# Altium PCB BeamBreakFix.PcbDoc
Units mm, origin at the board's own origin, x right, y up, seen from the top; angles counter-clockwise.
Board outline 22.2 x 51.3 mm, 2 copper layers (Top Layer, Bottom Layer), stack 0.97 mm thick; 15 components, 14 nets, 79 pads, 71 vias.
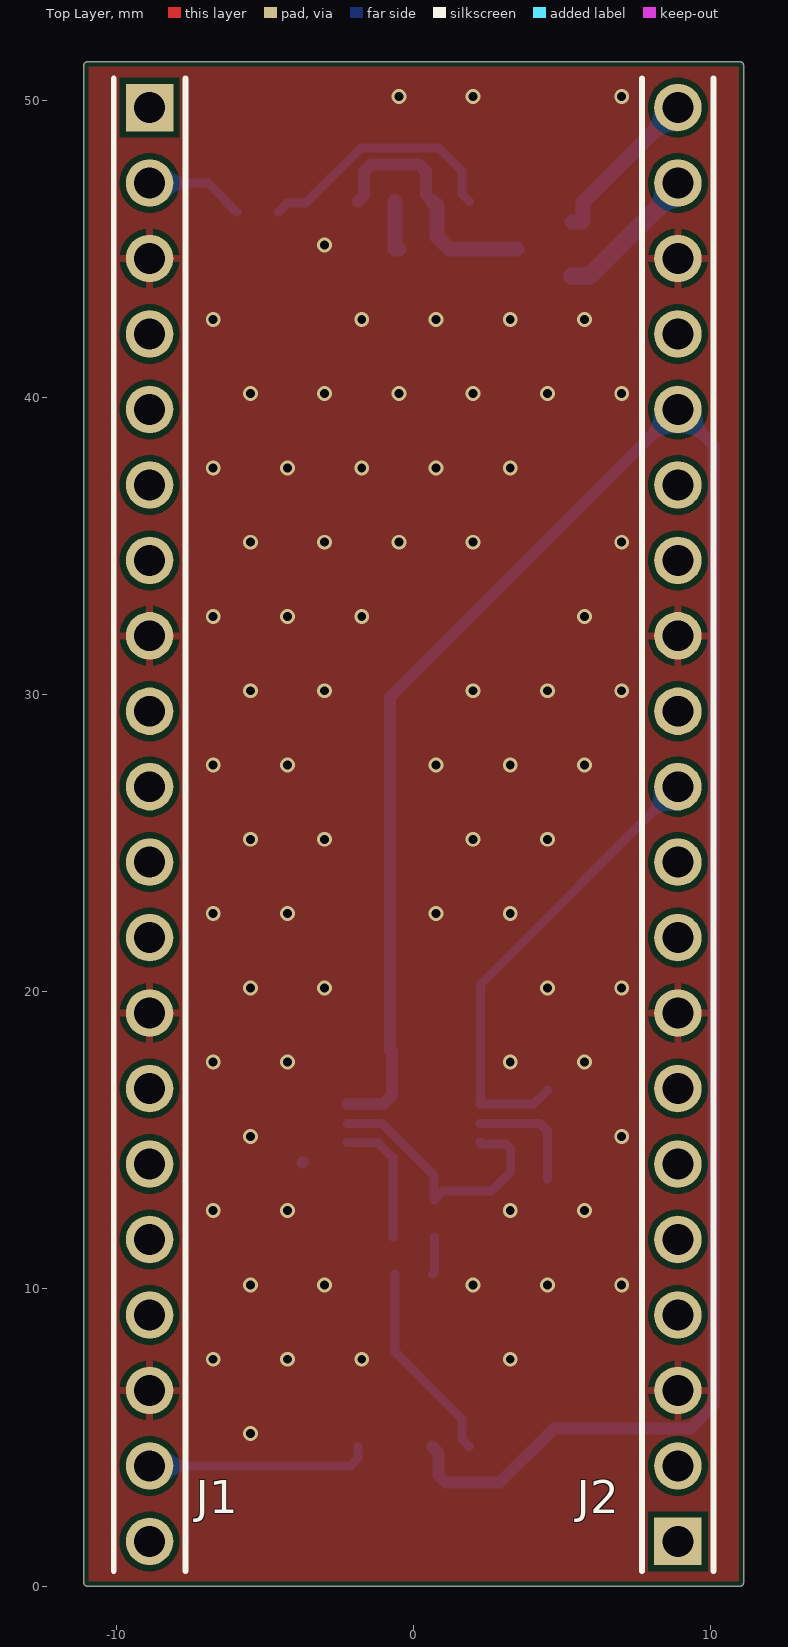
[diagram p0: Top Layer view]
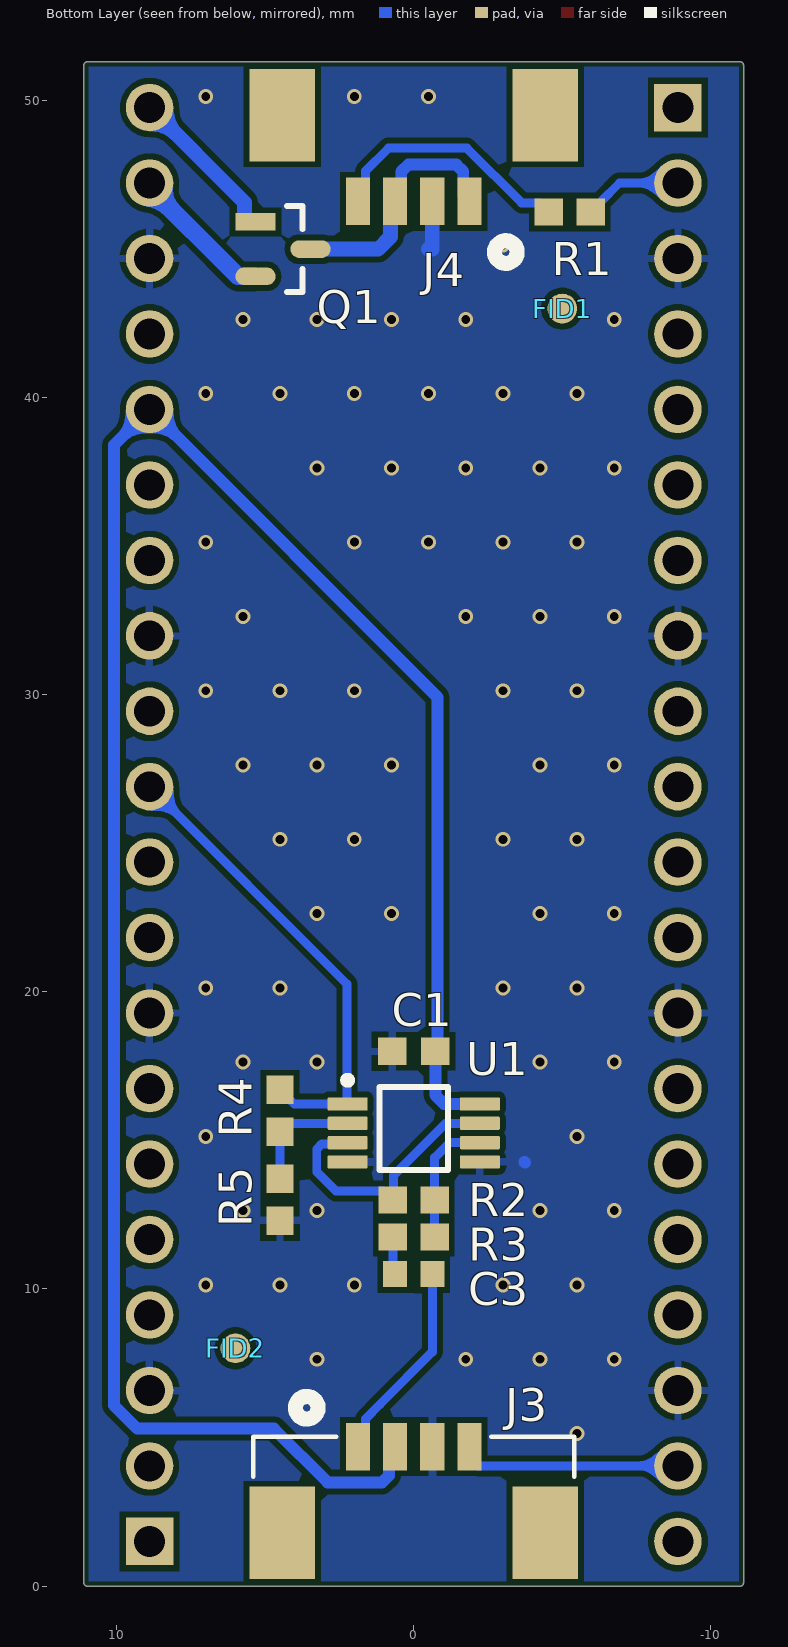
[diagram p1: Bottom Layer view, seen from below]
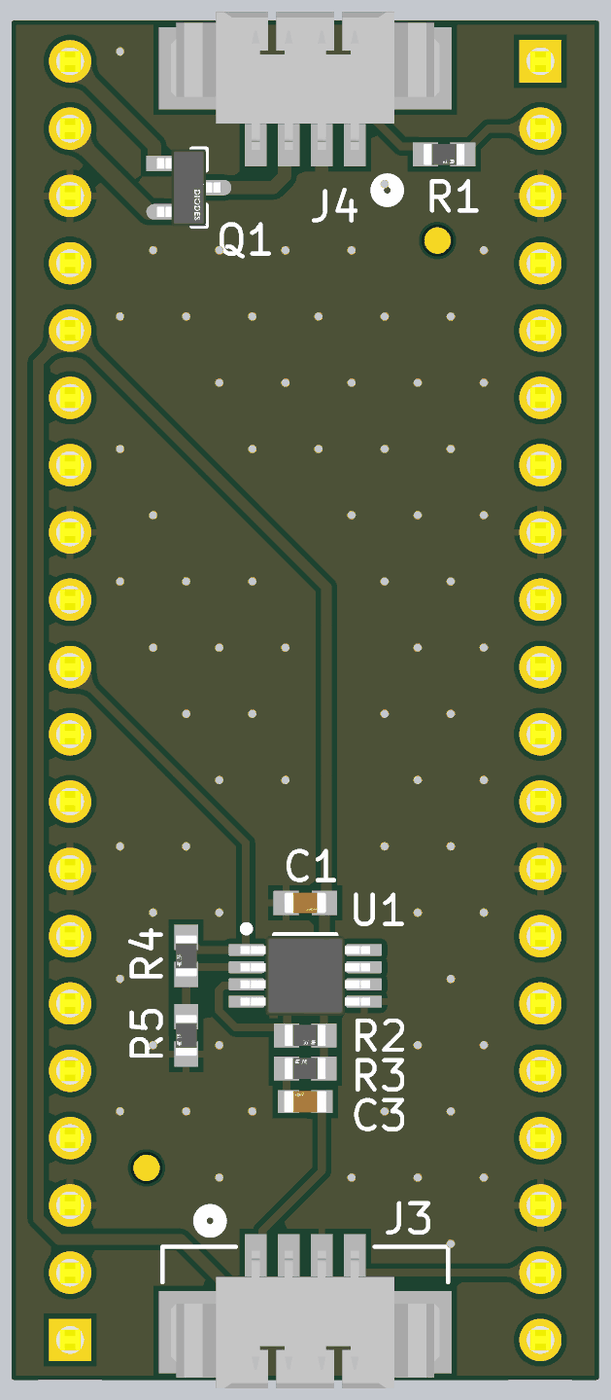
[diagram p2: 3D render of the assembled board from below, using the file's embedded part models]

## Layer stack, top to bottom
Top Solder: solder mask 0.0127, Solder Resist, Dk 3.8
Top Layer: signal copper 0.035
Dielectric: core 0.9, FR-4, Dk 4.5
Bottom Layer: signal copper 0.035
Bottom Solder: solder mask 0.0127, Solder Resist, Dk 3.8

## Board outline
-11.1,0.1 -11.1,51.2 cw(c-11,51.2) -11,51.3 11,51.3 cw(c11,51.2) 11.1,51.2 11.1,7.003 11.1,0.1 cw(c11,0.1) 11,0 -11,0 cw(c-11,0.1)

## Design rules (kind name [scope] priority, off if disabled: settings)
BoardOutlineClearance [All] p1: gap=0.15 ignorepadtopadclearanceinfootprint=FALSE except(0.05: Arc-OutlineEdge Arc-CavityEdge Arc-CutoutEdge Arc-SplitBarrior Arc-SplitContinuation)
Clearance Clearance_2 [HasFootprint('GCT_USB4080-03-A_REVA1')] p1: gap=0.2 ignorepadtopadclearanceinfootprint=TRUE except(0.1: Arc-Hole Track-Hole SMDPad-Hole THPad-Hole Via-Hole Fill-Hole Poly-Hole Region-Hole Text-Hole)
Clearance Clearance_1 [HasFootprint('GCT_USB4080-03-A_REVA1') vs OnLayer('Multi-Layer')] p2: gap=0 ignorepadtopadclearanceinfootprint=FALSE
Clearance [All] p3: gap=0.203 ignorepadtopadclearanceinfootprint=TRUE
ComponentClearance [All] p1: gap=0.254 collisioncheckmode=3 verticalgap=0.254 showdistances=FALSE donotcheckwithout3dbody=TRUE
HoleSize "HoleSize Via - Top-Int1" [InDrillLayerPair('[UVIA] Top Layer - Int1')] p1: absolutevalues=TRUE maxlimit=0.2 minlimit=0.15 maxpercent=80.000 minpercent=20.000
HoleSize "HoleSize Via - Bot-Int2" [InDrillLayerPair('[UVIA] Int2 - Bottom Layer')] p2: absolutevalues=TRUE maxlimit=0.2 minlimit=0.15 maxpercent=80.000 minpercent=20.000
HoleSize [All] p3: absolutevalues=TRUE maxlimit=3 minlimit=0.25 maxpercent=80.000 minpercent=20.000
HoleToHoleClearance HoleToHoleClearance_1 [HasFootprint('GCT_USB4080-03-A_REVA1')] p1: gap=0 allowstackedmicrovias=TRUE
HoleToHoleClearance [All] p2: gap=0.1 allowstackedmicrovias=TRUE
MinimumAnnularRing MinimumAnnularRing_VIA [IsVia] p1: minimumring=0.075
MinimumAnnularRing MinimumAnnularRing_VIA_U10 [OnLayer('Multi-Layer')] p2: minimumring=0.112
MinimumAnnularRing [All] p3: minimumring=0.178
MinimumSolderMaskSliver [All] p1: minsoldermaskwidth=0.076
PasteMaskExpansion PasteMaskExpansion_FDMC8030 [HasFootprint('TRANS_FDMC8030')] p1: expansion=0 percent=-20.000000
PasteMaskExpansion PasteMaskExpansion_IC_TPSM5601RSHRDAR [HasFootprint('IC_TPSM5601R5HRDAR')] p2: expansion=0 percent=-20.000000
PasteMaskExpansion PasteMaskExpansion_SOP65P490X110-8N [HasFootprint('SOP65P490X110-8N')] p3: expansion=0 percent=-20.000000
PasteMaskExpansion [All] p4: expansion=0
PlaneConnect [All] p1: planeconnectstyle=Relief reliefexpansion=0.508 reliefentries=4 reliefconductorwidth=0.254 reliefairgap=0.203
PolygonConnect PolygonConnect_SOLID [InNetClass('Power Nets')] p1: connectstyle=Direct reliefconductorwidth=0.254 reliefentries=4 polygonreliefangle="90 Angle" airgapwidth=0.254
PolygonConnect PolygonConnect_1 [All] p2: thpad.connectstyle=Relief thpad.reliefconductorwidth=0.254 thpad.reliefentries=4 thpad.polygonreliefangle="90 Angle" thpad.airgapwidth=0.203 smdpad.connectstyle=Relief smdpad.reliefconductorwidth=0.254 smdpad.reliefentries=4 smdpad.polygonreliefangle="90 Angle" smdpad.airgapwidth=0.203 via.connectstyle=Direct via.reliefconductorwidth=0.254 via.reliefentries=4 via.polygonreliefangle="90 Angle" via.airgapwidth=0.254
RoutingVias Vias_Top-Bottom [InDrillLayerPair('Top Layer - Bottom Layer')] p1: holewidth=0.25 width=0.55 viastyle="Through Hole" minholewidth=0.25 minwidth=0.5 maxholewidth=0.4 maxwidth=0.8
RoutingVias Vias_Blind_Top-Int1 [InDrillLayerPair('[UVIA] Top Layer - Int1')] p2: holewidth=0.15 width=0.3 viastyle="Through Hole" minholewidth=0.15 minwidth=0.3 maxholewidth=0.25 maxwidth=0.474
RoutingVias Vias_Blind_Bot-Int2 [InDrillLayerPair('[UVIA] Int2 - Bottom Layer')] p3: holewidth=0.15 width=0.3 viastyle="Through Hole" minholewidth=0.15 minwidth=0.3 maxholewidth=0.25 maxwidth=0.474
RoutingVias Vias_Burried [InDrillLayerPair('Int1 - Int2')] p4: holewidth=0.25 width=0.504 viastyle="Through Hole" minholewidth=0.25 minwidth=0.504 maxholewidth=0.35 maxwidth=0.604
ShortCircuit ShortCircuit_1 [HasFootprint('GCT_USB4080-03-A_REVA1') vs InNet('GND')] p1: allowed=TRUE
ShortCircuit [All] p2: allowed=FALSE
SilkToSilkClearance [All] p1: silktosilkclearance=0.1
SilkToSolderMaskClearance [IsPad] p1: minsilkscreentomaskgap=0.15 clearancetoexposedcopper=TRUE
SolderMaskExpansion SolderMaskExpansion_Vias [IsVia] p1: expansion=0 istentingtop=TRUE
SolderMaskExpansion [All] p2: expansion=0 istentingtop=FALSE
ViasUnderSMD [All] p1: allowed=TRUE
Width [All] p1: maxlimit=2 minlimit=0.2 preferedwidth=0.25 minimp=50.000000 maximp=50.000000 favimp=50.000000
21 further rules are at their usual default settings.

## Classes and differential pairs
component class PicoModuleInterface: FID1 FID2 J1 J2
component class BeamBreakFix: C1 C3 J3 J4 Q1 R1 R2 R3 R4 R5 U1

## Components (designator, comment, footprint, x,y, rotation, side; value= is the part's Value field where it differs from the comment)
C1 "C0603-100nF-100V-10%-X7R" FP-GRM188-0_1-e0_2_0_5-IPC_B 0,18 r180 bottom value=100nF
C3 "C0603-1nF-50V-1%-C0G" FP-0603-L_1_6_0_15-W_0_81-IPC_C 0,10.5 r0 bottom value=1nF
FID1 "FID-ROUND" Fid_Round -5,43 r90 bottom
FID2 "FID-ROUND" Fid_Round 6,8 r90 bottom
J1 "SSW-120-01-x-S" SAMTEC_SSW-120-01-G-S -8.89,49.765 r270 top locked
J2 "SSW-120-01-x-S - 21-40" "SAMTEC_SSW-120-01-G-S - 21-40" 8.89,1.505 r90 top locked
J3 "53261-0471" MOLEX_53261-0471 0,2.1 r180 bottom
J4 "53261-0471" MOLEX_53261-0471 0,49.2 r0 bottom
Q1 "DMG2305UX-7" FP-SOT23-IPC_B 4.4,45 r180 bottom
R1 "R0603-150R-1/16W-0.1%" FP-CPF0603-IPC_B -5.25,46.25 r0 bottom value=150
R2 "R0603-1M-1/16W-0.1%" FP-CPF0603-IPC_B 0,13 r0 bottom value=1M
R3 "R0603-1M-1/16W-0.1%" FP-CPF0603-IPC_B 0,11.75 r180 bottom value=1M
R4 "R0603-100k-1/16W-0.1%" FP-CPF0603-IPC_B 4.5,16 r90 bottom value=100k
R5 "R0603-4k7-1/16W-0.1%" FP-CPF0603-IPC_B 4.5,13 r90 bottom value=4.7k
U1 "OPA2353EA/250" DGK0008A_N 0,15.25 r180 bottom

## Footprints (in the part's own frame and the unit in brackets; to place one, negate y for a bottom-side part, rotate by r counter-clockwise, add the part's x,y. Pads: shape width x height; smd on the part's side, far side on the other; paste and mask are expansions set on the pad)
DGK0008A_N [mm] "TSOP, 8-Leads, Body 3.1x3.1mm, Pitch 0.65mm, IPC Medium Density"
  rrect22% 1.35x0.45 smd: 1(-2.225,0.975) 2(-2.225,0.325) 3(-2.225,-0.325) 4(-2.225,-0.975) 5(2.225,-0.975) 6(2.225,-0.325) 7(2.225,0.325) 8(2.225,0.975)
  silkscreen extent -2.35,-1.25 1.15,1.9, body extent -2.45,-1.5 2.45,1.5, height 0.94
Fid_Round [mm] "Round Fiducial"
  round 1 smd paste-1 mask+0.1: FID(0,0)
FP-0603-L_1_6_0_15-W_0_81-IPC_C [mm]
  rect 0.807x0.868 smd paste+0 mask+0: 1(-0.626,0) 2(0.626,0)
  body extent -0.8,-0.41 0.8,0.41, height 0.9
FP-CPF0603-IPC_B [mm]
  rect 0.958x0.912 smd paste+0 mask+0: 1(-0.702,0) 2(0.702,0)
  body extent -0.77,-0.4 0.77,0.4, height 0.55
FP-GRM188-0_1-e0_2_0_5-IPC_B [mm]
  rect 0.959x0.912 smd paste+0 mask+0: 1(-0.727,0) 2(0.727,0)
  body extent -0.8,-0.4 0.8,0.4, height 0.9
FP-SOT23-IPC_B [mm]
  rect 1.359x0.587 smd paste+0 mask+0: 1(-0.927,0.915)
  rrect100% 1.359x0.587 smd paste+0 mask+0: 2(-0.927,-0.915) 3(0.927,0)
  silkscreen extent 0.13,-1.45 0.65,1.45, body extent -1.2,-1.45 1.2,1.45, height 1.1
MOLEX_53261-0471 [mil] "UL"
  rect 32x63 smd paste+0 mask+0: 1(-73.82,102.13) 2(-24.61,102.13) 3(24.61,102.13) 4(73.82,102.13)
  rect 87x122 smd: 5(-174.21,-12.05) 6(174.21,-12.05)
  silkscreen extent -212,62 212,169, body extent -200,-95 200,109, height 134
SAMTEC_SSW-120-01-G-S [mm] "Socket Strip, 0.100\" Pitch"
  rect 1.6x1.6 hole 1.04: 1(0,0)
  round 1.6 hole 1.04: 2(2.54,0) 3(5.08,0) 4(7.62,0) 5(10.16,0) 6(12.7,0) 7(15.24,0) 8(17.78,0) 9(20.32,0) 10(22.86,0) 11(25.4,0) 12(27.94,0) 13(30.48,0) 14(33.02,0) 15(35.56,0) 16(38.1,0) 17(40.64,0) 18(43.18,0) 19(45.72,0) 20(48.26,0)
  silkscreen extent -0.98,-1.21 49.27,1.21, body extent -1.52,-1.21 49.78,1.21, height 8.51
"SAMTEC_SSW-120-01-G-S - 21-40" [mm] "Socket Strip, 0.100\" Pitch (pins 21 - 40)"
  rect 1.6x1.6 hole 1.04: 21(0,0)
  round 1.6 hole 1.04: 22(2.54,0) 23(5.08,0) 24(7.62,0) 25(10.16,0) 26(12.7,0) 27(15.24,0) 28(17.78,0) 29(20.32,0) 30(22.86,0) 31(25.4,0) 32(27.94,0) 33(30.48,0) 34(33.02,0) 35(35.56,0) 36(38.1,0) 37(40.64,0) 38(43.18,0) 39(45.72,0) 40(48.26,0)
  silkscreen extent -1.01,-1.21 49.24,1.21, body extent -1.52,-1.21 49.78,1.21, height 8.51

## Part data
C1: library part CMP-611-0027-19, "0.1µF ±10% 100V Ceramic Capacitor X7R 0603 (1608 Metric)", Capacitance=100nF, Capacitor Type=Ceramic, Case Code (Imperial)=0603, Case Code (Metric)=1608, Dielectric=X7R, Max Operating Temperature=125°C, Min Operating Temperature=-55°C, Package Quantity=1, Tolerance=10%, Voltage=100V, Case/Package=0603, Construction=Flat, Depth=0.8mm, Height=0.8mm, Lead Free="Lead Free", Length=1.6mm, Material=Ceramic, Mount="Surface Mount", Packaging="Tape and Reel", Pick&PlaceFootprint=0603_CAP, Radiation Hardening=No, REACH SVHC="No SVHC", RoHS=Yes, RoHS Compliant=Yes, Series=GRM, Size=0.8mm, Termination=SMD/SMT, Thickness=0.035inch, Voltage Rating=100V, Voltage Rating (DC)=100V, Weight=0.000222oz, Width=0.8mm
C3: library part CMP-611-0035-5, "0.001µF ±1% 50V Ceramic Capacitor C0G 0603 (1608 Metric)", Capacitor Type=Ceramic, Case/Package=0603_CAP, Dielectric=C0G, PartNumber=C0603-1nF-50V-5%-COG, Tolerance=1%, Voltage Rating=50V, Mount="Surface Mount", Pick&PlaceFootprint=C0603, RoHS=Yes
FID1 FID2: library part CMP-C00-0001-2, "Round Fiducial"
J1: library part CMP-310-0034-3, "Conn Socket Strip SKT 20 POS 2.54mm Solder ST Thru-Hole", Color=Black, Contact Material=Bronze, Contact Plating=Gold, Gender=Female, Mating Cycles=100, Mount="Through Hole", Number of Contacts=20, Number of Rows=1, Pitch=2.54mm, RoHS Compliant=Yes, Termination=Solder
J2: library part CMP-310-0035-2, "Conn Socket Strip SKT 20 POS 2.54mm Solder ST Thru-Hole (pins 21 - 40)", Color=Black, Contact Material=Bronze, Contact Plating=Gold, Gender=Female, Mating Cycles=100, Mount="Through Hole", Number of Contacts=20, Number of Rows=1, Pitch=2.54mm, RoHS Compliant=Yes, Termination=Solder
J3 J4: library part CMP-370-0017-6, "MOLEX 1.25mm (.049\") Pitch PicoBlade Header, Surface Mount, Right Angle, Lead-free, 4 Circuits", Color=Beige, Contact Resistance=20mR, Current Rating=1A, Flammability Rating="UL94 V-0", Housing Color=Natural, Insulation Resistance=100MR, Max Operating Temperature=105°C, Min Operating Temperature=-40°C, Package Quantity=1000, Voltage Rating=125V, Case/Package=53261-0471, Contact Gender=Male, Contact Material=Tin, Contact Plating=Tin, Contact Type=-, Gender=Male, Glow Wire Compliant=Non-compliant, Housing Material=Thermoplastic, Lead Free="Lead Free", Lead Pitch=1.25mm, Mount="Surface Mount", Number of Circuits=4, Number of Contacts=4, Number of Positions=4, Number of Rows=1, Orientation="Right Angle", Packaging="Cut Tape", Pitch=1.25mm, Radiation Hardening=No, REACH SVHC=Unknown, Series=53261, Termination=SMD/SMT, Voltage Rating (AC)=125V, Voltage Rating (DC)=125V, Weight=0.005598oz, Working Voltage=125V
Q1: library part CMP-830-0007-1, "Power Field-Effect Transistor, 4.2A I(D), 20V, 0.052ohm, 1-Element, P-Channel, Silicon, Metal-oxide Semiconductor FET", PartNumber=DMG2305UX, Mount="Surface Mount", Pick&PlaceFootprint=SOT-23-3
R1: library part CMP-633-0078-2, "Surface Mount Resistor 150 Ohm 1/16 W 0.1% 0603 (1608 Metric)", Case Code (Imperial)=0603, Case Code (Metric)=1608, Max Operating Temperature=155°C, Max Power Dissipation="62.5 mW", Min Operating Temperature=-55°C, Number of Resistors=1, Power Rating=62.5mW, Resistance=150, Resistance Tolerance=0.1%, Resistor Type="FIXED RESISTOR", Temperature Coefficient=25ppm/°C, Voltage Rating=50V, Case/Package=0603, Composition="Thin Film", Construction=Chip, ELV=Compliant, Height=0.45mm, Length=1.6mm, Mount="Surface Mount", Number of Pins=2, Number of Terminations=2, Packaging="Tape and Reel", Pick&PlaceFootprint=R0603, REACH SVHC=Yes, RoHS=Yes, RoHS Compliant=Yes, Series=CPF, Size Code=0603, Technology="THIN FILM", Termination=Wraparound, Tolerance=0.1%, Voltage Rating (DC)=50V, Weight=7.1E-05oz, Width=0.8mm
R2 R3: library part CMP-633-0066-9, "Surface Mount Resistor 1M Ohm 1/16 W 0.1% 0603 (1608 Metric)", Case Code (Imperial)=0603, Case Code (Metric)=1608, Max Operating Temperature=155°C, Max Power Dissipation="62.5 mW", Min Operating Temperature=-55°C, Number of Resistors=1, Power Rating=62.5mW, Resistance=1M, Resistance Tolerance=0.1%, Resistor Type="Thin Film", Temperature Coefficient=25ppm/°C, Voltage Rating=50V, Case/Package=0603, Composition="Thin Film", ELV=Compliant, Height=0.45mm, Length=1.6mm, Mount="Surface Mount", Number of Pins=2, Number of Terminations=2, Packaging="Tape and Reel", Pick&PlaceFootprint=R0603, REACH SVHC="No SVHC", RoHS=Yes, RoHS Compliant=Yes, Series=CPF, Size Code=0603, Technology="Thin Film", Termination=Solder, Tolerance=0.1%, Voltage Rating (DC)=50V, Weight=7.1E-05oz, Width=0.8mm
R4: library part CMP-633-0000-17, "Surface Mount Resistor 100k Ohm 1/16 W 0.1% 0603 (1608 Metric)", Case Code (Imperial)=0603, Case Code (Metric)=1608, Max Operating Temperature=155°C, Max Power Dissipation="62.5 mW", Min Operating Temperature=-55°C, Number of Resistors=1, Power Rating=62.5mW, Resistance=100k, Resistance Tolerance=0.1%, Resistor Type="Thin Film", Temperature Coefficient=25ppm/°C, Voltage Rating=50V, Case/Package=0603, Composition="Thin Film", ELV=Compliant, Height=0.45mm, Length=1.6mm, Mount="Surface Mount", Number of Pins=2, Number of Terminations=2, Packaging="Tape and Reel", Pick&PlaceFootprint=R0603, REACH SVHC="No SVHC", RoHS=Yes, RoHS Compliant=Yes, Series=CPF, Size Code=0603, Technology="Thin Film", Termination=Solder, Tolerance=0.1%, Voltage Rating (DC)=50V, Weight=7.1E-05oz, Width=0.8mm
R5: library part CMP-633-0024-17, "Surface Mount Resistor 4.7k Ohm 1/16 W 0.1% 0603 (1608 Metric)", Case Code (Imperial)=0603, Case Code (Metric)=1608, Max Operating Temperature=155°C, Max Power Dissipation="62.5 mW", Min Operating Temperature=-55°C, Number of Resistors=1, Power Rating=62.5mW, Resistance=4.7k, Resistance Tolerance=0.1%, Resistor Type="Thin Film", Temperature Coefficient=25ppm/°C, Voltage Rating=50V, Case/Package=0603, Composition="Thin Film", ELV=Compliant, Height=0.45mm, Length=1.6mm, Mount="Surface Mount", Number of Pins=2, Number of Terminations=2, Packaging="Tape and Reel", Pick&PlaceFootprint=R0603, REACH SVHC="No SVHC", RoHS=Yes, RoHS Compliant=Yes, Series=CPF, Size Code=0603, Technology="Thin Film", Termination=Solder, Tolerance=0.1%, Voltage Rating (DC)=50V, Weight=7.1E-05oz, Width=0.8mm
U1: library part CMP-941-0006-5, "Operational Amplifier, 2 Func, 8000uV Offset-Max, CMOS, PDSO8", Package Equivalence Code=TSSOP8,.19, PartNumber=OPA2353EA/250, Pick&PlaceFootprint=TSSOP8

## Via types
v1: diameter 0.5, hole 0.3, Top Layer to Bottom Layer, tented both sides, 71 vias

## Nets (pads, with @x,y where several pads share a name; then routed paths per layer and width w, separated by ;. In a path a pad name is that pad's centre, name@x,y a point inside that pad or via, vN(x,y) a via of type N, cw(c..) or ccw(c..) an arc to the next point about the centre after c; other vN are vias at no path point)
3V3: C1.2 J2.36 J3.2 U1.8 | length 74.2
  Bottom Layer w0.4: U1.8 -1.025,16.225 -0.727,16.523 C1.2 ; C1.2@-0.8,18 -0.8,29.915 J2.36 10.093,38.402 10.093,6.087 9.307,5.3 4.706,5.3 2.897,3.491 1.066,3.491 0.831,3.725 0.831,4.488 J3.2
3V3in: J4.1 J4.3 Q1.3 | length 8.6
  Bottom Layer w0.4: J4.1 -1.669,46.812 -1.669,47.612 -1.434,47.847 0.184,47.847 0.419,47.612 0.419,46.812 J4.3
  Bottom Layer w0.5: J4.3 0.781,46.45 0.781,45.419 1.2,45 Q1.3
"BEAM BREAK": J1.2 R1.1 | length 3.4
  Bottom Layer w0.3: J1.2 -6.927,47.225 -6.281,46.579 -6.281,46.556 -5.975,46.25 R1.1
GND: C1.1 J1.3 J1.8 J1.13 J1.18 J2.23 J2.28 J2.33 J2.38 J3.3 J4.2 R5.1 U1.4 U1.5 | length 1.8
  Bottom Layer w0.4: -3.75,14.25 -3.725,14.275
  Bottom Layer w0.5: J4.2 -0.625,45 -0.5,45
  other v1: -5.5,5.135 -6.75,7.635 -4.25,7.635 -1.75,7.635 3.25,7.635 -5.5,10.135 -3,10.135 2,10.135 4.5,10.135 7,10.135 -6.75,12.635 -4.25,12.635 3.25,12.635 5.75,12.635 -5.5,15.135 7,15.135 -6.75,17.635 -4.25,17.635 3.25,17.635 5.75,17.635 -5.5,20.135 -3,20.135 4.5,20.135 7,20.135 -6.75,22.635 -4.25,22.635 0.75,22.635 3.25,22.635 -5.5,25.135 -3,25.135 2,25.135 4.5,25.135 -6.75,27.635 -4.25,27.635 0.75,27.635 3.25,27.635 5.75,27.635 -5.5,30.135 -3,30.135 2,30.135 4.5,30.135 7,30.135 -6.75,32.635 -4.25,32.635 -1.75,32.635 5.75,32.635 -5.5,35.135 -3,35.135 -0.5,35.135 2,35.135 7,35.135 -6.75,37.635 -4.25,37.635 -1.75,37.635 0.75,37.635 3.25,37.635 -5.5,40.135 -3,40.135 -0.5,40.135 2,40.135 4.5,40.135 7,40.135 -6.75,42.635 -1.75,42.635 0.75,42.635 3.25,42.635 5.75,42.635 -3,45.135 -0.5,50.135 2,50.135 7,50.135
IR_LED: J1.19 J3.4 | length 7.5
  Bottom Layer w0.3: J1.19 -2.131,4.045 -1.875,4.301 J3.4
IR_PT: C3.1 J3.1 | length 6.8
  Bottom Layer w0.3: C3.1 -0.626,7.879 1.135,6.118 1.135,6.115 1.619,5.631 1.619,4.95 J3.1
IR_PT_FILTERED: J2.31 R4.2 U1.1 | length 15.9
  Bottom Layer w0.3: U1.1 U1.1@2.25,16.225 ; R4.2 4.5,16.679 4.194,16.373 4.166,16.373 4.018,16.225 U1.1@2.25,16.225 ; J2.31 2.25,20.265 U1.1@2.25,16.225
NetC3_2: C3.2 R3.1 | length 1.3
  Bottom Layer w0.3: C3.2 0.702,10.576 R3.1
NetJ4_4: J4.4 R1.2 | length 8.5
  Bottom Layer w0.3: R1.2 -4.242,46.556 -3.631,46.556 -1.787,48.4 0.85,48.4 1.625,47.625 1.625,46.856 J4.4
NetR2_1: R2.1 R3.2 U1.6 | length 4.4
  Bottom Layer w0.3: U1.6 -2.221,14.929 -1.211,14.929 -0.702,14.42 R2.1 R3.2
NetR2_2: R2.2 U1.3 U1.7 | length 9.3
  Bottom Layer w0.3: U1.7 -1.075,15.575 0.678,13.822 0.678,13.024 R2.2 1.002,13.3 2.625,13.3 3.266,13.941 3.266,14.707 3.09,14.883 2.267,14.883 U1.3
NetR4_1: R4.1 R5.2 U1.2 | length 4
  Bottom Layer w0.3: U1.2 4.244,15.575 4.5,15.319 R4.1 R5.2
VBUS: J2.40 Q1.1 | length 5.5
  Bottom Layer w0.5: Q1.1 5.657,45.915 5.7,45.958 5.7,46.575 J2.40
VSYS: J2.39 Q1.2 | length 5
  Bottom Layer w0.6: Q1.2 5.915,44.085 8.89,47.06 J2.39
pads on no net: FID1.FID FID2.FID J1.1 J1.4 J1.5 J1.6 J1.7 J1.9 J1.10 J1.11 J1.12 J1.14 J1.15 J1.16 J1.17 J1.20 J2.21 J2.22 J2.24 J2.25 J2.26 J2.27 J2.29 J2.30 J2.32 J2.34 J2.35 J2.37 J3.5 J3.6 J4.5 J4.6

## Polygon pours and split planes (outlines as drawn)
GND on Top Layer "GND_L01_P003" (solid, remove dead copper, pour order 3): -11.1,0.1 -11.1,51.2 cw(c-11,51.2) -11,51.3 11,51.3 cw(c11,51.2) 11.1,51.2 11.1,7.003 11.1,0.1 cw(c11,0.1) 11,0 -11,0 cw(c-11,0.1)
GND on Bottom Layer "GND_L02_P002" (solid, pour order 2): -11.1,0.1 -11.1,51.2 cw(c-11,51.2) -11,51.3 11,51.3 cw(c11,51.2) 11.1,51.2 11.1,7.003 11.1,0.1 cw(c11,0.1) 11,0 -11,0 cw(c-11,0.1)

## Silkscreen, mask and mechanical layers (free items; w line width, h text height)
Mechanical 1:
  lines w0.1: 0,0 0,0.3 ; -11.1,0.1 ccw(c-11,0.1) -11,0 11,0 ccw(c11,0.1) 11.1,0.1 11.1,7.003 11.1,51.2 ccw(c11,51.2) 11,51.3 -11,51.3 ccw(c-11,51.2) -11.1,51.2 -11.1,44.297 -11.1,7.003 -11.1,0.1
Fab Notes:
  lines w0.381: 15.342,9.696 25.911,9.696 49.894,9.696 72.072,9.696 88.832,9.696 103.528,9.696 ; 15.342,12.793 25.911,12.793 49.894,12.793 72.072,12.793 88.832,12.793 103.528,12.793 ; 15.342,15.889 25.911,15.889 49.894,15.889 72.072,15.889 88.832,15.889 103.528,15.889 ; 15.342,18.986 25.911,18.986 49.894,18.986 72.072,18.986 88.832,18.986 103.528,18.986 ; 15.342,22.082 25.911,22.082 49.894,22.082 72.072,22.082 88.832,22.082 103.528,22.082 ; 15.342,25.179 25.911,25.179 49.894,25.179 72.072,25.179 88.832,25.179 103.528,25.179 ; 15.342,28.275 103.528,28.275 ; 25.911,31.372 25.911,6.6 ; 49.894,31.372 49.894,6.6 ; 72.072,31.372 72.072,6.6 ; 88.832,31.372 88.832,6.6 ; 25.911,6.6 49.894,6.6 ; 25.911,6.6 15.342,6.6 15.342,31.372 103.528,31.372 103.528,6.6 88.832,6.6 ; 49.894,6.6 72.072,6.6 ; 72.072,6.6 88.832,6.6
  text "Layer" at 17.144,29.049 h1.55
  text "Name" at 27.714,29.049 h1.55
  text "Material" at 51.697,29.049 h1.55
  text "Thickness" at 73.874,29.049 h1.55
  text "Constant" at 90.634,29.049 h1.55
  text "Top Overlay" at 27.714,25.953 h1.55
  text "Top Solder" at 27.714,22.856 h1.55
  text "Solder Resist" at 51.697,22.856 h1.55
  text "0.013mm" at 73.874,22.856 h1.55
  text "3.8" at 90.634,22.856 h1.55
  text "1" at 17.144,19.76 h1.55
  text "Top Layer" at 27.714,19.76 h1.55
  text "0.035mm" at 73.874,19.76 h1.55
  text "Dielectric" at 27.714,16.663 h1.55
  text "FR-4" at 51.697,16.663 h1.55
  text "0.900mm" at 73.874,16.663 h1.55
  text "4.5" at 90.634,16.663 h1.55
  text "2" at 17.144,13.567 h1.55
  text "Bottom Layer" at 27.714,13.567 h1.55
  text "0.035mm" at 73.874,13.567 h1.55
  text "Bottom Solder" at 27.714,10.471 h1.55
  text "Solder Resist" at 51.697,10.471 h1.55
  text "0.013mm" at 73.874,10.471 h1.55
  text "3.8" at 90.634,10.471 h1.55
  text "Bottom Overlay" at 27.714,7.374 h1.55
  text "Total board thickness:" at 17.144,4.278 h1.55
  text "0.995mm" at 73.874,4.278 h1.55
Drill Drawing:
  lines w0.254: 16.519,56.836 18.212,56.836 17.365,55.143 16.519,56.836 ; 16.519,58.953 18.212,58.953 18.212,60.646 16.519,60.646 16.519,58.953
  lines w0.381: 15,54 194.834,54 ; 15,61.62 194.834,61.62 ; 28.992,50.19 28.992,65.43 ; 43.466,50.19 43.466,65.43 ; 71.144,50.19 71.144,65.43 ; 83.994,50.19 83.994,65.43 ; 102.632,50.19 102.632,65.43 ; 140.721,50.19 140.721,65.43 ; 155.703,50.19 155.703,65.43 ; 174.646,50.19 174.646,65.43 ; 15,50.19 194.834,50.19 194.834,65.43 15,65.43 15,50.19
  text "Symbol" at 17.286,62.763 h1.83
  text "Count" at 30.135,62.763 h1.83
  text "Hole Size" at 44.609,62.763 h1.83
  text "Plated" at 72.287,62.763 h1.83
  text "Hole Type" at 85.137,62.763 h1.83
  text "Drill Layer Pair" at 103.775,62.763 h1.83
  text "Via/Pad" at 141.864,62.763 h1.83
  text "Pad Shape" at 156.846,62.763 h1.83
  text "Template" at 175.789,62.763 h1.83
  text "71" at 30.135,58.953 h1.52
  text "11.81mil (0.300mm)" at 44.609,58.953 h1.52
  text "PTH" at 72.287,58.953 h1.52
  text "Round" at 85.137,58.953 h1.52
  text "Top Layer - Bottom Layer" at 103.775,58.953 h1.52
  text "Via" at 141.864,58.953 h1.52
  text "Rounded" at 156.846,58.953 h1.52
  text "v50h30m0mx0" at 175.789,58.953 h1.52
  text "40" at 30.135,55.143 h1.52
  text "40.95mil (1.040mm)" at 44.609,55.143 h1.52
  text "PTH" at 72.287,55.143 h1.52
  text "Round" at 85.137,55.143 h1.52
  text "Top Layer - Bottom Layer" at 103.775,55.143 h1.52
  text "Pad" at 141.864,55.143 h1.52
  text "(Mixed)" at 156.846,55.143 h1.52
  text "(Mixed)" at 175.789,55.143 h1.52
  text "111 Total" at 30.135,51.333 h1.52